# EAGLE board 20170814_DukeExperimentalHeadstageAmplifier (EAGLE 8.2.2)
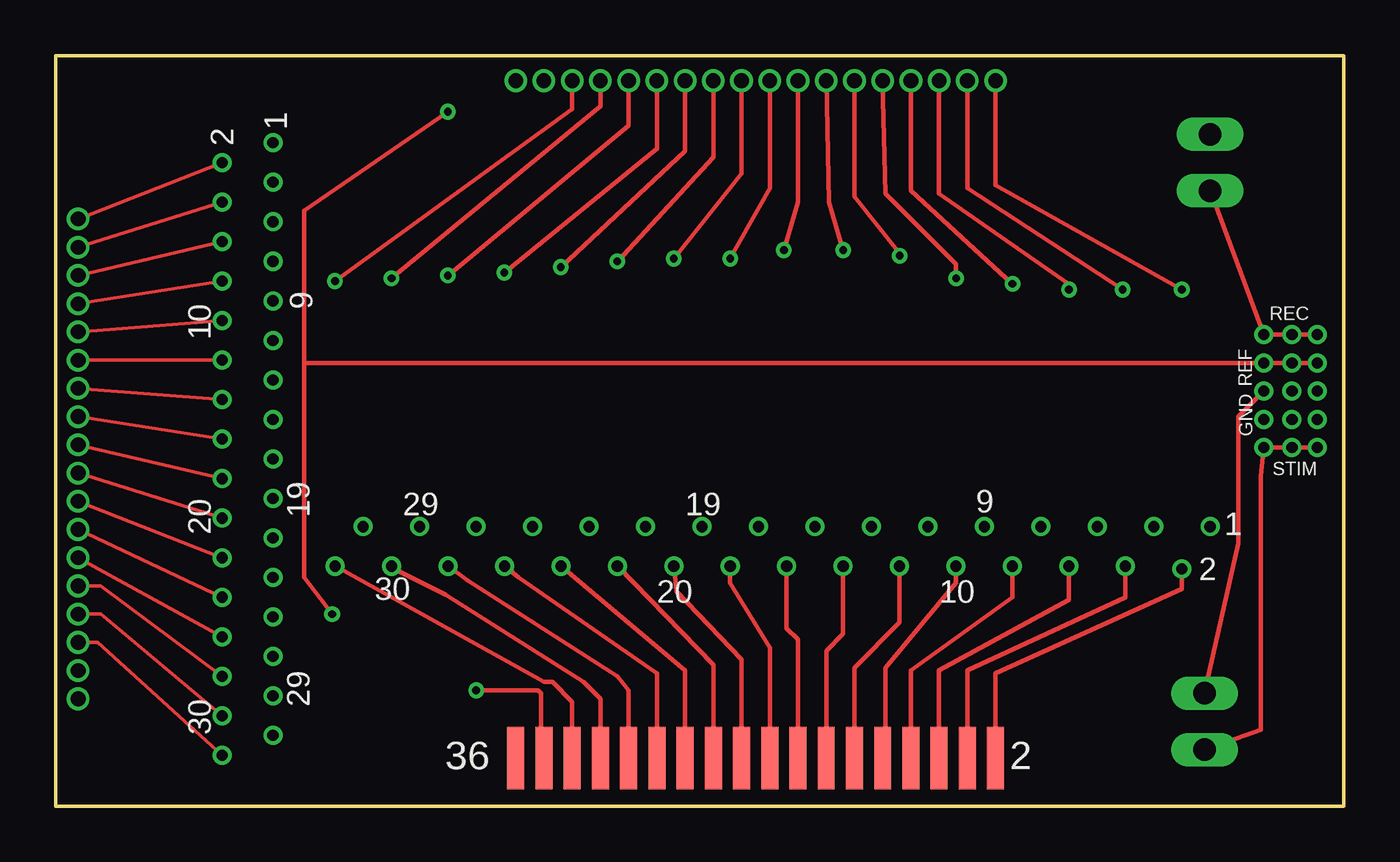
[diagram p0: board, top side]
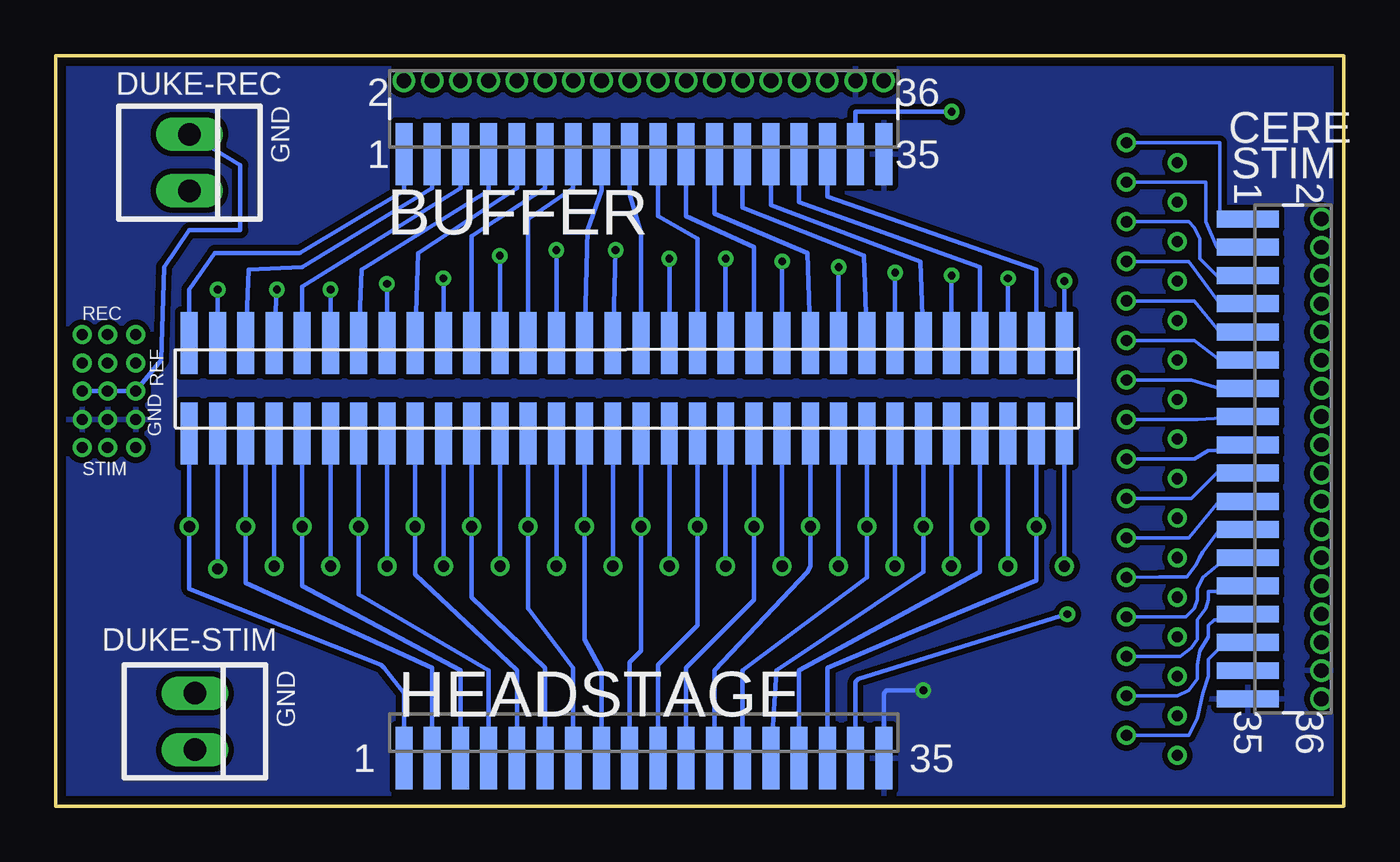
[diagram p1: board, bottom side, seen from below]

Size 57.96 x 33.77 mm. Coordinates in mm from the lower left corner, seen from the top.
Outline: 0,0 57.96,0 57.96,33.77 0,33.77 0,0
Copper layers (1*16): Top 0.0356mm / dielectric 1.5011mm / Bottom 0.0356mm
Design rules "oshpark-2layer": minimum track width 6mil, minimum drill 13mil, track to track 6mil, track to pad 6mil, pad to pad 6mil, via to via 6mil, smd to smd 6mil, copper to edge 15mil, drill to drill 6mil, minimum pad ring 7mil, minimum via ring 7mil, stop-mask expansion 2.5mil, vias tented up to drill 0mil, thermal gap 10mil

## Footprints (pad centres in the part's own frame; a part is rotated, then mirrored left to right if it is on the bottom)
FTSH-118-01-L-MT = smd 0.762 x 2.794: 1 -9.525,-2.032; 3 -8.255,-2.032; 5 -6.985,-2.032; 7 -5.715,-2.032; 9 -4.445,-2.032; 11 -3.175,-2.032; 13 -1.905,-2.032; 15 -0.635,-2.032; 17 0.635,-2.032; 19 1.905,-2.032; 21 3.175,-2.032; 23 4.445,-2.032; 25 5.715,-2.032; 27 6.985,-2.032; 29 8.255,-2.032; 31 9.525,-2.032; 33 10.795,-2.032; 35 12.065,-2.032 | drill 0.66: 2 -9.525,1.27; 4 -8.255,1.27; 6 -6.985,1.27; 8 -5.715,1.27; 10 -4.445,1.27; 12 -3.175,1.27; 14 -1.905,1.27; 16 -0.635,1.27; 18 0.635,1.27; 20 1.905,1.27; 22 3.175,1.27; 24 4.445,1.27; 26 5.715,1.27; 28 6.985,1.27; 30 8.255,1.27; 32 9.525,1.27; 34 10.795,1.27; 36 12.065,1.27
22-23-2021 = drill 1 long: 1 -1.27,0; 2 1.27,0
SFMC-118-L1-S-D = smd 0.762 x 2.794: 1 -10.795,-2.032; 3 -9.525,-2.032; 5 -8.255,-2.032; 7 -6.985,-2.032; 9 -5.715,-2.032; 11 -4.445,-2.032; 13 -3.175,-2.032; 15 -1.905,-2.032; 17 -0.635,-2.032; 19 0.635,-2.032; 21 1.905,-2.032; 23 3.175,-2.032; 25 4.445,-2.032; 27 5.715,-2.032; 29 6.985,-2.032; 31 8.255,-2.032; 33 9.525,-2.032; 35 10.795,-2.032 | smd 0.762 x 2.794 bottom: 2 -10.795,-2.032; 4 -9.525,-2.032; 6 -8.255,-2.032; 8 -6.985,-2.032; 10 -5.715,-2.032; 12 -4.445,-2.032; 14 -3.175,-2.032; 16 -1.905,-2.032; 18 -0.635,-2.032; 20 0.635,-2.032; 22 1.905,-2.032; 24 3.175,-2.032; 26 4.445,-2.032; 28 5.715,-2.032; 30 6.985,-2.032; 32 8.255,-2.032; 34 9.525,-2.032; 36 10.795,-2.032
VIA = drill 0.5 pad 0.813: P$1 0,0
FTSH-132-01-DV = smd 0.762 x 2.794: 1 -10.795,-2.032; 2 -10.795,2.032; 3 -9.525,-2.032; 4 -9.525,2.032; 5 -8.255,-2.032; 6 -8.255,2.032; 7 -6.985,-2.032; 8 -6.985,2.032; 9 -5.715,-2.032; 10 -5.715,2.032; 11 -4.445,-2.032; 12 -4.445,2.032; 13 -3.175,-2.032; 14 -3.175,2.032; 15 -1.905,-2.032; 16 -1.905,2.032; 17 -0.635,-2.032; 18 -0.635,2.032; 19 0.635,-2.032; 20 0.635,2.032; 21 1.905,-2.032; 22 1.905,2.032; 23 3.175,-2.032; 24 3.175,2.032; 25 4.445,-2.032; 26 4.445,2.032; 27 5.715,-2.032; 28 5.715,2.032; 29 6.985,-2.032; 30 6.985,2.032; 31 8.255,-2.032; 32 8.255,2.032; 33 9.525,-2.032; 34 9.525,2.032; 35 10.795,-2.032; 36 10.795,2.032; 37 12.065,-2.032; 38 12.065,2.032; 39 13.335,-2.032; 40 13.335,2.032; 41 14.605,-2.032; 42 14.605,2.032; 43 15.875,-2.032; 44 15.875,2.032; 45 17.145,-2.032; 46 17.145,2.032; 47 18.415,-2.032; 48 18.415,2.032; 49 19.685,-2.032; 50 19.685,2.032; 51 20.955,-2.032; 52 20.955,2.032; 53 22.225,-2.032; 54 22.225,2.032; 55 23.495,-2.032; 56 23.495,2.032; 57 24.765,-2.032; 58 24.765,2.032; 59 26.035,-2.032; 60 26.035,2.032; 61 27.305,-2.032; 62 27.305,2.032; 63 28.575,-2.032; 64 28.575,2.032
LPPB051NFFN-RC = drill 0.5: P$1 0,0; P$2 -1.27,0; P$3 -2.54,0; P$4 -3.81,0; P$5 -5.08,0

## Placement (x,y rotation side)
BUFFER  FTSH-118-01-L-MTREGULAR  [FTSH-118-01-L-MT]  32.77,31.37 0 bottom
DUKE-REC  22-23-2021  [22-23-2021]  51.94,28.96 270 bottom
DUKE-STIM  22-23-2021  [22-23-2021]  51.69,3.81 270 bottom
HEADSTAGE  SFMC-118-L1-S-D  [SFMC-118-L1-S-D]  31.5,4.19 0 bottom
STIM  FTSH-118-01-L-MTREGULAR  [FTSH-118-01-L-MT]  2.29,16.89 270 bottom
U$1  VIA  [VIA]  7.49,28.96 0 top
U$2  VIA  [VIA]  7.49,27.18 90 bottom
U$3  FTSH-132-01-L-DV  [FTSH-132-01-DV]  41.15,18.8 0 bottom
U$4  VIA  [VIA]  7.49,25.4 0 top
U$5  VIA  [VIA]  7.49,23.62 0 top
U$6  VIA  [VIA]  7.49,21.84 0 top
U$7  VIA  [VIA]  7.49,20.07 0 top
U$8  VIA  [VIA]  7.49,18.29 0 top
U$9  VIA  [VIA]  7.49,16.51 0 top
U$10  VIA  [VIA]  7.49,14.73 0 top
U$11  VIA  [VIA]  7.49,12.95 0 top
U$12  VIA  [VIA]  7.49,11.18 0 top
U$13  VIA  [VIA]  7.49,9.4 0 top
U$14  VIA  [VIA]  7.49,7.62 0 top
U$15  VIA  [VIA]  7.49,5.84 0 top
U$16  VIA  [VIA]  7.49,4.06 0 top
U$17  VIA  [VIA]  7.49,2.29 0 top
U$18  VIA  [VIA]  9.78,3.17 0 top
U$19  VIA  [VIA]  9.78,4.95 0 top
U$20  VIA  [VIA]  9.78,6.73 0 top
U$21  VIA  [VIA]  9.78,8.51 0 top
U$22  VIA  [VIA]  9.78,10.29 0 top
U$23  VIA  [VIA]  9.78,12.06 0 top
U$24  VIA  [VIA]  9.78,13.84 0 top
U$25  VIA  [VIA]  9.78,15.62 0 top
U$26  VIA  [VIA]  9.78,17.4 0 top
U$27  VIA  [VIA]  9.78,19.18 0 top
U$28  VIA  [VIA]  9.78,20.95 0 top
U$29  VIA  [VIA]  9.78,22.73 0 top
U$30  VIA  [VIA]  9.78,24.51 0 top
U$31  VIA  [VIA]  9.78,26.29 0 top
U$32  VIA  [VIA]  9.78,28.07 0 top
U$33  VIA  [VIA]  9.78,29.84 0 top
U$34  LPPB051NFFN-RC  [LPPB051NFFN-RC]  54.36,21.21 90 top
U$35  LPPB051NFFN-RC  [LPPB051NFFN-RC]  56.77,21.21 90 top
U$36  LPPB051NFFN-RC  [LPPB051NFFN-RC]  55.63,21.21 90 top

## Library data of the parts
BUFFER HEADSTAGE STIM U$3 = tuckerLib2
DUKE-REC DUKE-STIM = con-molex; MF: MOLEX; MPN: 22-23-2021; OC_FARNELL: 1462926; OC_NEWARK: 25C3832
U$1 U$2 U$4-U$36 = Sombeck_lib

## Nets
0V: BUFFER.33 HEADSTAGE.33 U$34.P$2 U$35.P$2 U$36.P$2
GND: BUFFER.34 BUFFER.35 HEADSTAGE.34 HEADSTAGE.35 STIM.34 STIM.35 U$34.P$4 U$35.P$4 U$36.P$4
N$1: BUFFER.1 U$3.2
N$2: BUFFER.29 U$3.58
N$3: BUFFER.3 U$3.6
N$4: BUFFER.2 U$3.4
N$5: BUFFER.5 U$3.10
N$6: BUFFER.7 U$3.14
N$7: BUFFER.9 U$3.18
N$8: BUFFER.11 U$3.22
N$9: BUFFER.13 U$3.26
N$10: BUFFER.15 U$3.30
N$11: BUFFER.17 U$3.34
N$12: BUFFER.19 U$3.38
N$13: BUFFER.27 U$3.54
N$14: BUFFER.23 U$3.46
N$15: BUFFER.25 U$3.50
N$16: BUFFER.4 U$3.8
N$17: BUFFER.6 U$3.12
N$18: BUFFER.31 U$3.62
N$19: BUFFER.8 U$3.16
N$20: BUFFER.10 U$3.20
N$21: BUFFER.12 U$3.24
N$22: BUFFER.14 U$3.28
N$23: BUFFER.16 U$3.32
N$24: BUFFER.18 U$3.36
N$25: BUFFER.20 U$3.40
N$26: BUFFER.21 U$3.42
N$27: BUFFER.22 U$3.44
N$28: BUFFER.24 U$3.48
N$29: BUFFER.26 U$3.52
N$30: BUFFER.28 U$3.56
N$31: BUFFER.30 U$3.60
N$32: BUFFER.32 U$3.64
N$33: HEADSTAGE.1 U$3.1
N$34: HEADSTAGE.3 U$3.5
N$35: HEADSTAGE.5 U$3.9
N$36: HEADSTAGE.7 U$3.13
N$37: HEADSTAGE.9 U$3.17
N$38: HEADSTAGE.11 U$3.21
N$39: HEADSTAGE.13 U$3.25
N$40: HEADSTAGE.15 U$3.29
N$41: HEADSTAGE.17 U$3.33
N$42: HEADSTAGE.19 U$3.37
N$43: HEADSTAGE.21 U$3.41
N$44: HEADSTAGE.23 U$3.45
N$45: HEADSTAGE.25 U$3.49
N$46: HEADSTAGE.27 U$3.53
N$47: HEADSTAGE.29 U$3.57
N$48: HEADSTAGE.31 U$3.61
N$49: HEADSTAGE.2 U$3.3
N$50: HEADSTAGE.4 U$3.7
N$51: HEADSTAGE.6 U$3.11
N$52: HEADSTAGE.8 U$3.15
N$53: HEADSTAGE.10 U$3.19
N$54: HEADSTAGE.12 U$3.23
N$55: HEADSTAGE.14 U$3.27
N$56: HEADSTAGE.16 U$3.31
N$57: HEADSTAGE.18 U$3.35
N$58: HEADSTAGE.20 U$3.39
N$59: HEADSTAGE.22 U$3.43
N$60: HEADSTAGE.24 U$3.47
N$61: HEADSTAGE.26 U$3.51
N$62: HEADSTAGE.28 U$3.55
N$63: HEADSTAGE.30 U$3.59
N$64: HEADSTAGE.32 U$3.63
N$65: STIM.1 U$33.P$1
N$66: STIM.3 U$32.P$1
N$67: STIM.5 U$31.P$1
N$68: STIM.7 U$30.P$1
N$69: STIM.9 U$29.P$1
N$70: STIM.11 U$28.P$1
N$71: STIM.13 U$27.P$1
N$72: STIM.15 U$26.P$1
N$73: STIM.17 U$25.P$1
N$74: STIM.19 U$24.P$1
N$75: STIM.21 U$23.P$1
N$76: STIM.23 U$22.P$1
N$77: STIM.25 U$21.P$1
N$78: STIM.27 U$20.P$1
N$79: STIM.29 U$19.P$1
N$80: STIM.31 U$18.P$1
N$81: STIM.32 U$17.P$1
N$82: STIM.30 U$16.P$1
N$83: STIM.28 U$15.P$1
N$84: STIM.26 U$14.P$1
N$85: STIM.24 U$13.P$1
N$86: STIM.22 U$12.P$1
N$87: STIM.20 U$11.P$1
N$88: STIM.18 U$10.P$1
N$89: STIM.16 U$9.P$1
N$90: STIM.14 U$8.P$1
N$91: STIM.12 U$7.P$1
N$92: STIM.10 U$6.P$1
N$93: STIM.8 U$5.P$1
N$94: STIM.6 U$4.P$1
N$95: STIM.4 U$2.P$1
N$96: STIM.2 U$1.P$1
N$97: DUKE-REC.1 DUKE-STIM.1 U$34.P$3 U$35.P$3 U$36.P$3
N$98: DUKE-REC.2 U$34.P$1 U$35.P$1 U$36.P$1
N$99: DUKE-STIM.2 U$34.P$5 U$35.P$5 U$36.P$5

## Tracks (layer width: path | path; a pad name or v marks a point on that pad's centre or on a via)
0V  (via drill 0.35)
  Top 0.203: v12.45,8.64 11.18,10.29 11.18,19.94 | 11.18,19.94 U$34.P$2 U$36.P$2 U$35.P$2 | v17.65,31.24 11.18,26.8 11.18,19.94
  Bottom 0.203: HEADSTAGE.33 21.97,5.59 21.84,5.71 v12.45,8.64 | BUFFER.33 21.97,31.24 v17.65,31.24
GND  (via drill 0.35)
  Top 0.203: v18.92,5.21 21.72,5.21 21.84,5.08 21.84,3.17 HEADSTAGE.34
  Bottom 0.203: HEADSTAGE.35 20.7,5.08 20.57,5.21 v18.92,5.21
  pour Bottom (isolate 0.254): 0.13,0.13 0.25,33.78 57.53,33.78 57.53,0.13
N$1
  Bottom 0.203: U$3.2 51.94,23.24 50.8,24.89 46.99,24.89 42.29,27.69 BUFFER.1
N$2
  Bottom 0.203: BUFFER.29 24.51,27.18 16.38,24.26 U$3.58
N$3
  Bottom 0.203: BUFFER.3 41.02,27.81 46.86,24.26 49.28,24.13 U$3.6
N$4  (via drill 0.35 pad 0.55)
  Top 0.203: BUFFER.2 42.29,27.94 v50.67,23.24
  Bottom 0.203: v50.67,23.24 U$3.4
N$5
  Bottom 0.203: U$3.10 46.86,23.37 39.75,27.81 BUFFER.5
N$6
  Bottom 0.203: U$3.14 44.2,24.13 38.48,27.69 BUFFER.7
N$7
  Bottom 0.203: U$3.18 41.66,24.89 37.21,27.81 BUFFER.9
N$8
  Bottom 0.203: U$3.22 39.24,25.65 35.94,27.81 BUFFER.11
N$9
  Bottom 0.203: U$3.26 36.7,26.42 34.67,27.81 BUFFER.13
N$10
  Bottom 0.203: U$3.30 34.04,25.91 33.4,27.69 BUFFER.15
N$11
  Bottom 0.203: U$3.34 31.62,25.78 32.13,27.56 BUFFER.17
N$12
  Bottom 0.203: U$3.38 29.08,25.53 30.86,26.54 BUFFER.19
N$13
  Bottom 0.203: U$3.54 19.05,24.51 25.78,27.05 BUFFER.27
N$14
  Bottom 0.203: U$3.46 24.13,24.89 28.32,26.67 BUFFER.23
N$15
  Bottom 0.203: U$3.50 21.59,24.77 27.05,26.92 BUFFER.25
N$16  (via drill 0.35 pad 0.55)
  Top 0.203: BUFFER.4 41.02,27.81 v48.01,23.24
  Bottom 0.203: v48.01,23.24 U$3.8
N$17  (via drill 0.35 pad 0.55)
  Top 0.203: BUFFER.6 39.75,27.56 45.59,23.5 v45.59,23.24
  Bottom 0.203: v45.59,23.24 U$3.12
N$18
  Bottom 0.203: U$3.62 13.84,24.13 23.24,27.43 BUFFER.31
N$19  (via drill 0.35 pad 0.55)
  Top 0.203: BUFFER.8 38.48,27.69 v43.05,23.5
  Bottom 0.203: v43.05,23.5 U$3.16
N$20  (via drill 0.35 pad 0.55)
  Top 0.203: BUFFER.10 37.34,27.56 40.51,24.38 v40.51,23.75
  Bottom 0.203: v40.51,23.75 U$3.20
N$21  (via drill 0.35 pad 0.55)
  Top 0.203: BUFFER.12 35.94,27.43 37.97,24.89 v37.97,24.77
  Bottom 0.203: v37.97,24.77 U$3.24
N$22  (via drill 0.35 pad 0.55)
  Top 0.203: BUFFER.14 34.8,27.18 v35.43,25.02
  Bottom 0.203: v35.43,25.02 U$3.28
N$23  (via drill 0.35 pad 0.55)
  Top 0.203: BUFFER.16 33.4,27.18 v32.77,25.02
  Bottom 0.203: v32.77,25.02 U$3.32
N$24  (via drill 0.35 pad 0.55)
  Top 0.203: BUFFER.18 32.13,27.81 v30.35,24.64
  Bottom 0.203: v30.35,24.64 U$3.36
N$25  (via drill 0.35 pad 0.55)
  Top 0.203: BUFFER.20 30.86,28.45 v27.81,24.64
  Bottom 0.203: v27.81,24.64 U$3.40
N$26
  Bottom 0.203: U$3.42 26.54,25.15 29.59,26.54 BUFFER.21
N$27  (via drill 0.35 pad 0.55)
  Top 0.203: BUFFER.22 29.59,29.21 v25.27,24.51
  Bottom 0.203: v25.27,24.51 U$3.44
N$28  (via drill 0.35 pad 0.55)
  Top 0.203: BUFFER.24 28.32,29.46 v22.73,24.26
  Bottom 0.203: v22.73,24.26 U$3.48
N$29  (via drill 0.35 pad 0.55)
  Top 0.203: BUFFER.26 27.05,29.59 v20.19,24
  Bottom 0.203: v20.19,24 U$3.52
N$30  (via drill 0.35 pad 0.55)
  Top 0.203: BUFFER.28 25.78,30.61 v17.65,23.88
  Bottom 0.203: v17.65,23.88 U$3.56
N$31  (via drill 0.35 pad 0.55)
  Top 0.203: v15.11,23.75 24.51,31.5 BUFFER.30
  Bottom 0.203: U$3.60 v15.11,23.75
N$32  (via drill 0.35 pad 0.55)
  Top 0.203: BUFFER.32 23.24,31.37 v12.57,23.62
  Bottom 0.203: v12.57,23.62 U$3.64
N$33  (via drill 0.5)
  Bottom 0.203: U$3.1 v51.94,12.57 51.94,9.78 43.31,6.35 43.18,6.22 42.29,5.08 HEADSTAGE.1
N$34  (via drill 0.5)
  Bottom 0.203: U$3.5 v49.4,12.57 49.4,10.03 41.02,6.22 HEADSTAGE.3
N$35  (via drill 0.5)
  Bottom 0.203: U$3.9 v46.86,12.57 46.86,9.91 39.75,6.1 HEADSTAGE.5
N$36  (via drill 0.5)
  Bottom 0.203: U$3.13 v44.32,12.57 44.32,9.53 38.48,6.1 HEADSTAGE.7
N$37  (via drill 0.5)
  Bottom 0.203: U$3.17 v41.78,12.57 41.78,10.41 37.21,6.1 HEADSTAGE.9
N$38  (via drill 0.5)
  Bottom 0.203: U$3.21 v39.24,12.57 39.24,9.4 35.94,6.22 HEADSTAGE.11
N$39  (via drill 0.5)
  Bottom 0.203: U$3.25 v36.7,12.57 36.7,8.89 34.67,6.22 HEADSTAGE.13
N$40  (via drill 0.5)
  Bottom 0.203: U$3.29 v34.16,12.57 34.16,7.49 33.4,6.1 HEADSTAGE.15
N$41  (via drill 0.5)
  Bottom 0.203: U$3.33 v31.62,12.57 31.62,6.99 32.13,6.48 HEADSTAGE.17
N$42  (via drill 0.5)
  Bottom 0.203: U$3.37 v29.08,12.57 29.08,8.13 30.86,6.35 HEADSTAGE.19
N$43  (via drill 0.5)
  Bottom 0.203: U$3.41 v26.54,12.57 26.54,9.27 29.59,6.22 HEADSTAGE.21
N$44  (via drill 0.5)
  Bottom 0.203: U$3.45 v24,12.57 24,10.79 24.13,10.54 28.32,6.1 HEADSTAGE.23
N$45  (via drill 0.5)
  Bottom 0.203: U$3.49 v21.46,12.57 21.46,10.29 27.05,6.1 HEADSTAGE.25
N$46  (via drill 0.5)
  Bottom 0.203: U$3.53 v18.92,12.57 18.92,10.54 25.53,6.1 HEADSTAGE.27
N$47  (via drill 0.5)
  Bottom 0.203: U$3.57 v16.38,12.57 16.38,10.54 24.51,6.1 HEADSTAGE.29
N$48  (via drill 0.5)
  Bottom 0.203: U$3.61 v13.84,12.57 13.84,10.16 19.05,8 23.24,6.22 HEADSTAGE.31
N$49  (via drill 0.5 pad 0.55)
  Top 0.203: v50.67,10.67 50.67,9.78 42.29,5.97 HEADSTAGE.2
  Bottom 0.203: v50.67,10.67 U$3.3
N$50  (via drill 0.5 pad 0.55)
  Top 0.203: v48.13,10.79 48.13,9.4 41.02,6.1 HEADSTAGE.4
  Bottom 0.203: v48.13,10.79 U$3.7
N$51  (via drill 0.5 pad 0.55)
  Top 0.203: v45.59,10.79 45.59,9.27 39.75,6.1 HEADSTAGE.6
  Bottom 0.203: v45.59,10.79 U$3.11
N$52  (via drill 0.5 pad 0.55)
  Top 0.203: v43.05,10.79 43.05,9.4 38.48,6.1 HEADSTAGE.8
  Bottom 0.203: v43.05,10.79 U$3.15
N$53  (via drill 0.5 pad 0.55)
  Top 0.203: v40.51,10.79 40.51,10.03 37.34,6.22 37.34,1.91 HEADSTAGE.10
  Bottom 0.203: v40.51,10.79 U$3.19
N$54  (via drill 0.5 pad 0.55)
  Top 0.203: v37.97,10.79 37.97,8.26 35.94,6.22 HEADSTAGE.12
  Bottom 0.203: v37.97,10.79 U$3.23
N$55  (via drill 0.5 pad 0.55)
  Top 0.203: v35.43,10.79 35.43,7.75 34.67,6.99 HEADSTAGE.14
  Bottom 0.203: v35.43,10.79 U$3.27
N$56  (via drill 0.5 pad 0.55)
  Top 0.203: v32.89,10.79 32.89,8 33.4,7.49 HEADSTAGE.16
  Bottom 0.203: v32.89,10.79 U$3.31
N$57  (via drill 0.5 pad 0.55)
  Top 0.203: v30.35,10.79 30.35,10.03 32.13,7.11 HEADSTAGE.18
  Bottom 0.203: v30.35,10.79 U$3.35
N$58  (via drill 0.5 pad 0.55)
  Top 0.203: v27.81,10.79 27.94,9.65 30.86,6.6 HEADSTAGE.20
  Bottom 0.203: v27.81,10.79 U$3.39
N$59  (via drill 0.5 pad 0.55)
  Top 0.203: v25.27,10.79 29.59,6.35 HEADSTAGE.22
  Bottom 0.203: v25.27,10.79 U$3.43
N$60  (via drill 0.5 pad 0.55)
  Top 0.203: v22.73,10.79 23.5,10.16 28.32,6.1 HEADSTAGE.24
  Bottom 0.203: v22.73,10.79 U$3.47
N$61  (via drill 0.5 pad 0.55)
  Top 0.203: v20.19,10.79 20.83,10.29 27.05,5.97 HEADSTAGE.26
  Bottom 0.203: v20.19,10.79 U$3.51
N$62  (via drill 0.5 pad 0.55)
  Top 0.203: v17.65,10.79 18.54,10.16 25.27,5.84 25.78,5.21 HEADSTAGE.28
  Bottom 0.203: v17.65,10.79 U$3.55
N$63  (via drill 0.5 pad 0.55)
  Top 0.203: v15.11,10.79 15.49,10.54 17.53,9.53 23.75,5.59 24.51,4.83 HEADSTAGE.30
  Bottom 0.203: v15.11,10.79 U$3.59
N$64  (via drill 0.5 pad 0.55)
  Top 0.203: v12.57,10.79 21.97,5.59 22.35,5.59 23.24,4.7 HEADSTAGE.32
  Bottom 0.203: v12.57,10.79 U$3.63
N$65
  Bottom 0.152: STIM.1 5.59,26.42 5.59,29.84 U$33.P$1
N$66
  Bottom 0.152: STIM.3 5.71,25.15 6.22,26.29 6.22,28.07 U$32.P$1
N$67
  Bottom 0.152: STIM.5 5.71,23.88 6.48,24.64 6.48,25.53 6.73,26.04 6.99,26.29 U$31.P$1
N$68
  Bottom 0.152: STIM.7 5.59,22.61 6.99,24.51 U$30.P$1
N$69
  Bottom 0.152: STIM.9 5.59,21.34 6.73,22.73 U$29.P$1
N$70
  Bottom 0.152: STIM.11 5.59,20.07 6.73,20.95 U$28.P$1
N$71
  Bottom 0.152: STIM.13 5.59,18.8 6.86,19.18 U$27.P$1
N$72
  Bottom 0.152: U$26.P$1 6.6,17.4 STIM.15
N$73
  Bottom 0.152: STIM.17 5.59,16 6.1,16 6.73,15.62 U$25.P$1
N$74
  Bottom 0.152: STIM.19 5.71,14.99 6.86,13.84 U$24.P$1
N$75
  Bottom 0.152: STIM.21 5.71,13.59 6.99,12.06 U$23.P$1
N$76
  Bottom 0.152: STIM.23 5.59,12.45 6.35,11.43 6.51,11.17 6.63,10.87 7.06,10.32 7.8,10.32 8.3,10.31 U$22.P$1
N$77
  Bottom 0.152: STIM.25 5.21,10.92 5.59,10.92 6.35,10.29 6.6,9.78 6.6,9.27 6.73,8.89 7.11,8.51 U$21.P$1
N$78
  Bottom 0.152: STIM.27 5.59,9.65 6.1,9.65 6.1,9.27 6.22,8.89 6.6,8.38 6.6,7.49 6.86,7.11 7.37,6.73 U$20.P$1
N$79
  Bottom 0.152: STIM.29 5.59,8.38 5.84,8.38 6.1,8.13 6.1,7.62 6.48,6.99 6.6,6.35 6.6,5.71 6.99,5.21 7.49,4.95 U$19.P$1
N$80
  Bottom 0.152: STIM.31 5.59,7.11 6.1,6.6 6.1,5.84 6.35,5.08 6.6,3.94 6.99,3.17 U$18.P$1
N$81
  Top 0.152: STIM.32 1.91,7.37 U$17.P$1
N$82
  Top 0.152: STIM.30 2.03,8.64 U$16.P$1
N$83
  Top 0.152: STIM.28 2.03,9.91 U$15.P$1
N$84
  Top 0.152: STIM.26 U$14.P$1
N$85
  Top 0.152: STIM.24 U$13.P$1
N$86
  Top 0.152: STIM.22 U$12.P$1
N$87
  Top 0.152: STIM.20 U$11.P$1
N$88
  Top 0.152: STIM.18 U$10.P$1
N$89
  Top 0.152: STIM.16 U$9.P$1
N$90
  Top 0.152: STIM.14 U$8.P$1
N$91
  Top 0.152: STIM.12 U$7.P$1
N$92
  Top 0.152: STIM.10 U$6.P$1
N$93
  Top 0.152: STIM.8 U$5.P$1
N$94
  Top 0.152: STIM.6 U$4.P$1
N$95
  Top 0.152: STIM.4 U$2.P$1
N$96
  Top 0.152: STIM.2 U$1.P$1
N$97
  Top 0.203: DUKE-STIM.1 53.21,11.81 53.21,17.53 U$34.P$3
  Bottom 0.203: U$35.P$3 U$36.P$3 U$34.P$3 53.21,20.07 53.09,24.26 51.94,25.91 49.66,25.91 49.66,28.83 DUKE-REC.1
N$98
  Top 0.203: U$35.P$1 U$36.P$1 U$34.P$1 DUKE-REC.2
N$99
  Top 0.203: DUKE-STIM.2 54.23,3.43 54.23,14.86 U$34.P$5 U$36.P$5 U$35.P$5

## Text on the board
tPlace: 1 | 2 | 10 | 9 | REC | REF | GND | 19 | STIM | 20 | 29 | 19 | 9 | 1 | 2 | 30 | 20 | 10 | 29 | 30
bPlace: GND | REC | REF | GND | STIM | GND
bNames: CERE